# Altium PCB Arduino_PCB.PcbDoc
Units mm, origin at the board's own origin, x right, y up, seen from the top; angles counter-clockwise.
Board outline 385.83 x 207.26 mm, 2 copper layers (Top Layer, Bottom Side); 113 components, 62 nets, 247 pads, 0 vias.
Unrouted connection lines stored in the file: 30.
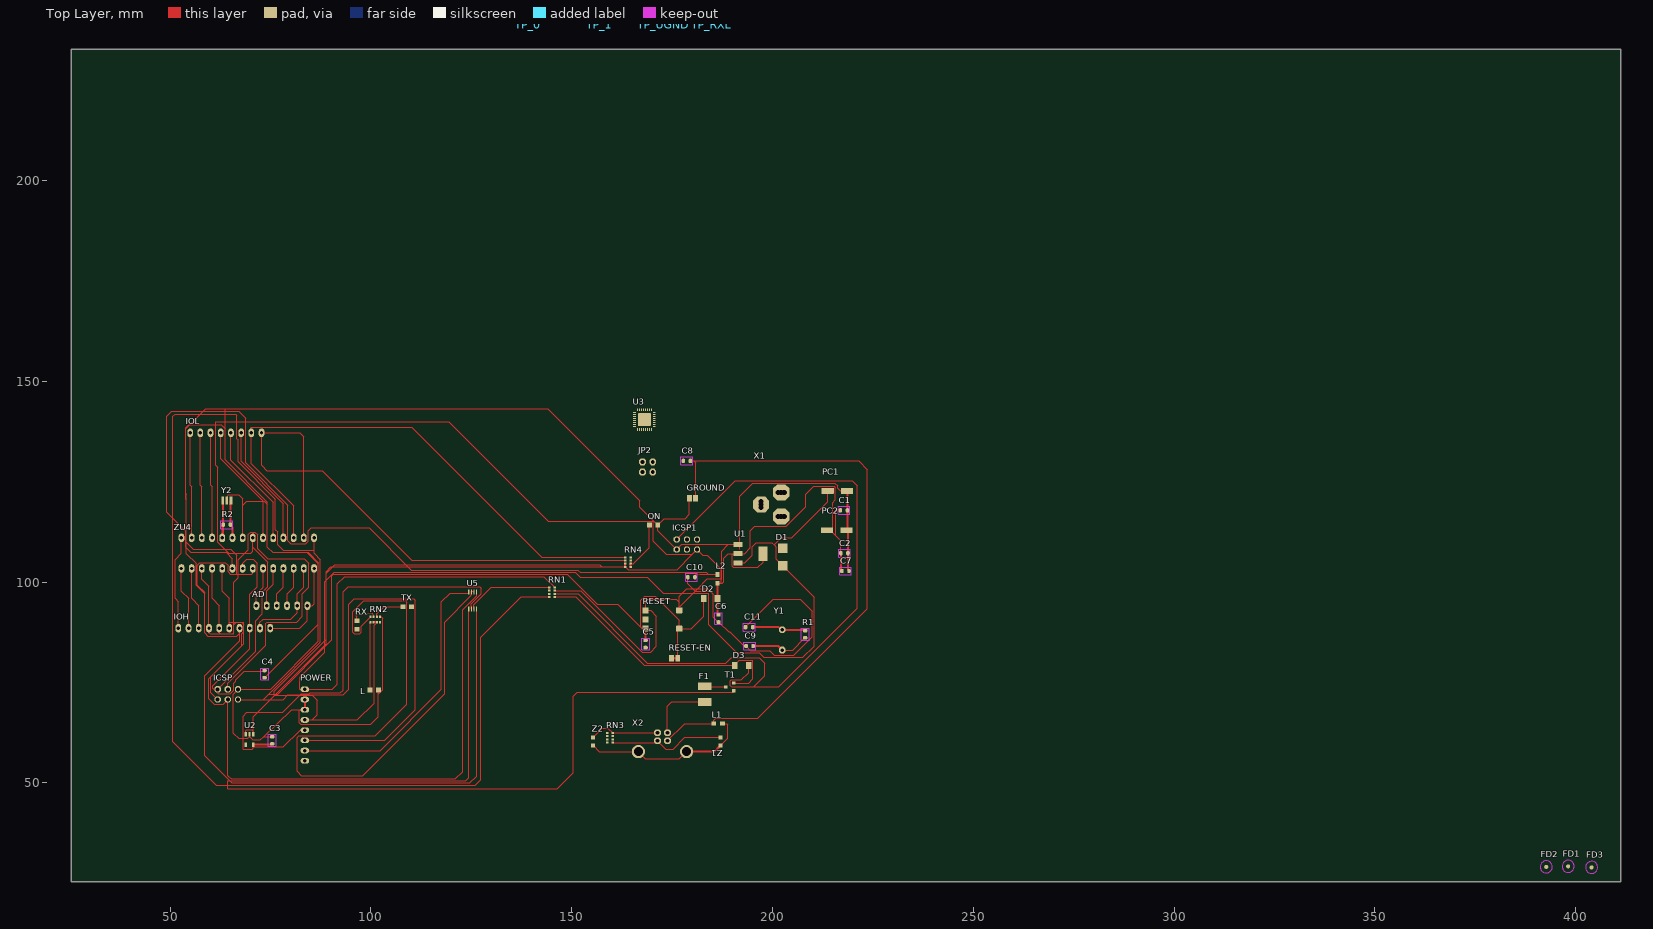
[diagram p0: Top Layer view]
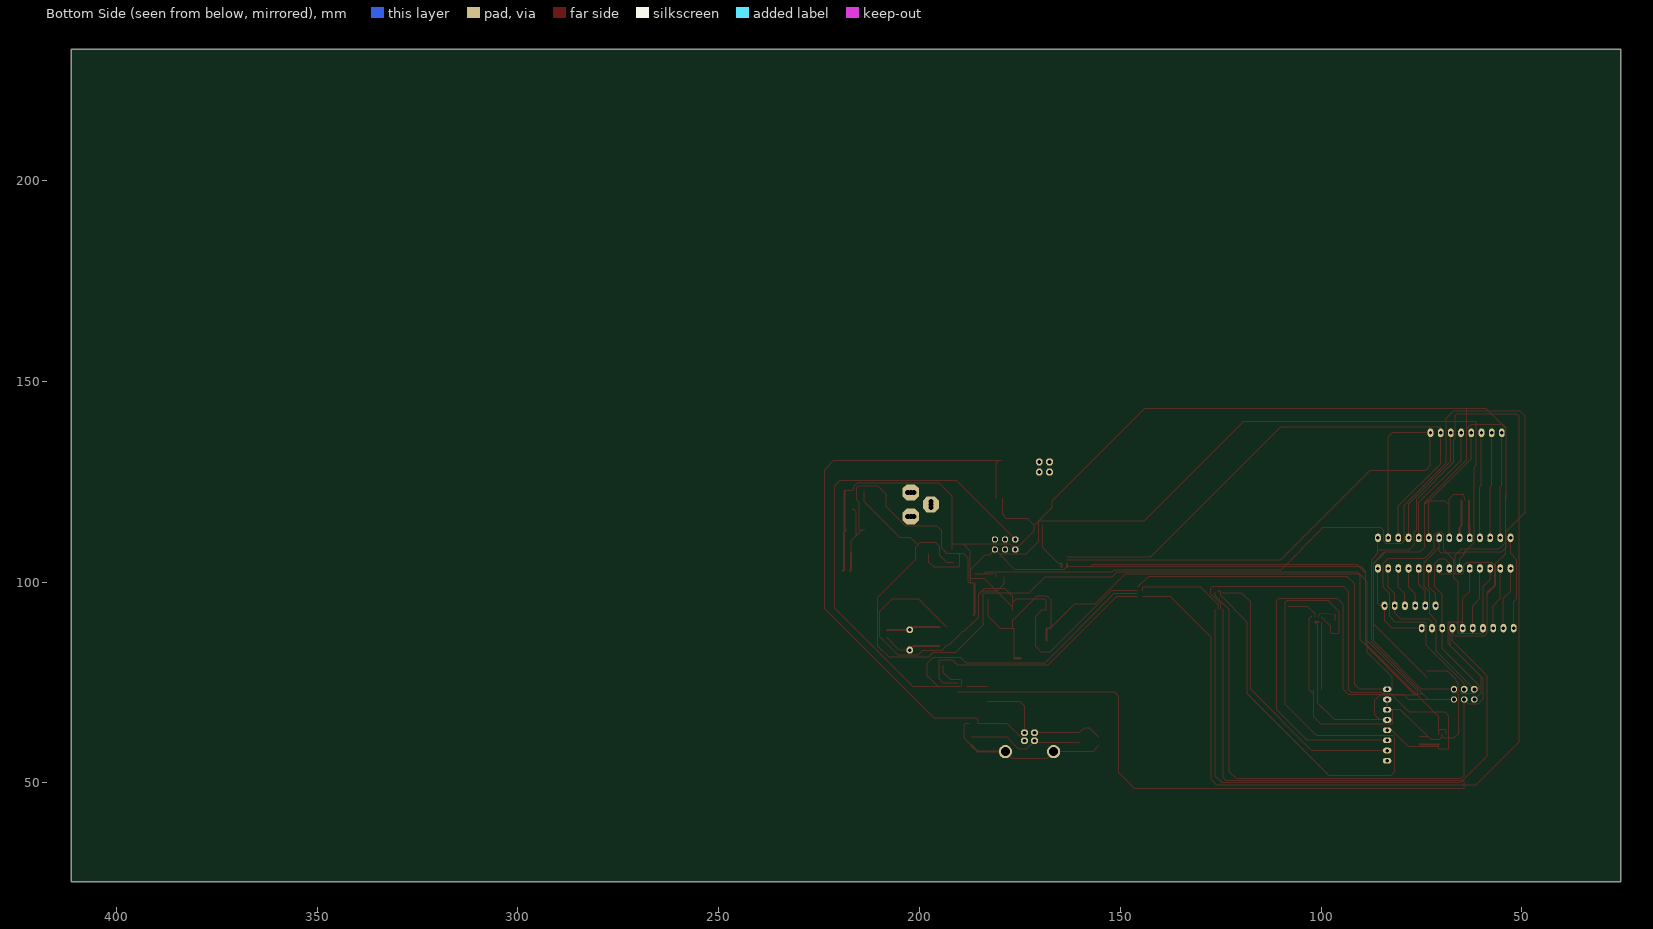
[diagram p1: Bottom Side view, seen from below]

## Layer stack, top to bottom
Top Solder: solder mask 0.0102, Solder Resist, Dk 3.5
Top Layer: signal copper 0.0356
Dielectric 1: dielectric 0.32, FR-4, Dk 4.8
Bottom Side: signal copper (thickness not stored)
Bottom Solder: solder mask 0.0102, Solder Resist, Dk 3.5

## Board outline
25.4,25.4 411.226,25.4 411.226,232.664 25.4,232.664

## Design rules (kind name [scope] priority, off if disabled: settings)
Clearance [All] p1: gap=0.254 ignorepadtopadclearanceinfootprint=FALSE
DiffPairsRouting [All] p1: maxlimit=0.254 minlimit=0.254 mostfreqgap=0.254 toplayer_minwidth=0.381 toplayer_maxwidth=0.381 toplayer_prefwidth=0.381 bottomlayer_minwidth=0.381 bottomlayer_maxwidth=0.381 bottomlayer_prefwidth=0.381 substack1={21367B57-AEF0-4E4E-8D23-0A43C6DC3519} toplayer_{21367b57-aef0-4e4e-8d23-0a43c6dc3519}_minwidth=0.381 toplayer_{21367b57-aef0-4e4e-8d23-0a43c6dc3519}_maxwidth=0.381 toplayer_{21367b57-aef0-4e4e-8d23-0a43c6dc3519}_prefwidth=0.381 bottomlayer_{21367b57-aef0-4e4e-8d23-0a43c6dc3519}_minwidth=0.381 bottomlayer_{21367b57-aef0-4e4e-8d23-0a43c6dc3519}_maxwidth=0.381 bottomlayer_{21367b57-aef0-4e4e-8d23-0a43c6dc3519}_prefwidth=0.381 maxuncoupledlength=12.7
PolygonConnect [All] p1: connectstyle=Relief reliefconductorwidth=0.254 reliefentries=4 polygonreliefangle="90 Angle" airgapwidth=0.254
RoutingLayers [All] p1: top layer_v5=TRUE bottom layer_v5=FALSE
RoutingVias [All] p1: holewidth=0.711 width=1.27 viastyle="Through Hole" minholewidth=0.711 minwidth=1.27 maxholewidth=0.711 maxwidth=1.27
SolderMaskExpansion [All] p1: expansion=0.102 istentingtop=FALSE
SupplyNets "Schematic Supply Nets_1" [InNet('+5V')] p1: voltage=0.000
SupplyNets "Schematic Supply Nets" [InNet('GND')] p2: voltage=0.000
Width [All] p1: maxlimit=0.254 minlimit=0.254 preferedwidth=0.254 substack1={21367B57-AEF0-4E4E-8D23-0A43C6DC3519} toplayer_{21367b57-aef0-4e4e-8d23-0a43c6dc3519}_minwidth=0.508 toplayer_{21367b57-aef0-4e4e-8d23-0a43c6dc3519}_maxwidth=0.508 toplayer_{21367b57-aef0-4e4e-8d23-0a43c6dc3519}_prefwidth=0.508
28 further rules are at their usual default settings.

## Components (designator, comment, footprint, x,y, rotation, side; value= is the part's Value field where it differs from the comment)
AD "6x1F-H8.5" 1X06 77.851,94.107 r0 top
C1 "100n" C0603-ROUND 217.805,117.856 r180 top
C2 "100n" C0603-ROUND 217.932,107.188 r180 top
C3 "1u" C0603-ROUND 75.438,60.579 r270 top
C4 "100n" C0603-ROUND 73.533,77.089 r90 top
C5 "100n" C0603-ROUND 168.402,84.582 r90 top
C6 "100n" C0603-ROUND 186.563,90.932 r90 top
C7 "100n" C0603-ROUND 218.186,102.743 r0 top
C8 "1u" C0603-ROUND 178.689,130.175 r0 top
C9 "22p" C0603-ROUND 194.31,84.074 r180 top
C10 "100n" C0603-ROUND 179.832,101.219 r0 top
C11 "22p" C0603-ROUND 194.183,88.773 r180 top
D1 "M7" SMB 202.565,106.213 r90 top
D2 "CD1206-S01575" MINIMELF 184.609,95.885 r180 top
D3 "CD1206-S01575" MINIMELF 192.356,79.248 r0 top
F1 "MF-MSMF050-2 500mA" L1812 183.134,72.091 r270 top
FD1 "FIDUCIALMOUNT" FIDUCIA-MOUNT 398.145,29.21 r0 top
FD2 "FIDUCIALMOUNT" FIDUCIA-MOUNT 392.684,29.083 r0 top
FD3 "FIDUCIALMOUNT" FIDUCIA-MOUNT 403.987,28.956 r0 top
GROUND "SJ" SJ 180.086,120.904 r0 top
ICSP "3x2 M" 2X03 64.389,72.009 r0 top
ICSP1 "3x2 M" 2X03 178.689,109.347 r180 top
IOH "10x1F-H8.5" 1X10 63.5,88.519 r0 top
IOL "8x1F-H8.5" 1X08 63.881,137.16 r180 top
JP2 "2x2 M - NM" 2X02 168.91,128.651 r180 top
L "YELLOW" CHIP-LED0805 100.838,73.152 r270 top
L1 "BLM21" 0805 186.479,64.77 r0 top
L2 "10uH" 0805 186.309,100.795 r90 top
ON "GREEN" CHIP-LED0805 170.4,114.173 r270 top
ORIGIN "TP_SP" TP-SP 70.485,243.332 r90 top
PC1 "47u" PANASONIC_D 216.167,122.682 r180 top
PC2 "47u" PANASONIC_D 216.027,112.903 r180 top
POWER "8x1F-H8.5" 1X08 83.566,64.389 r90 top
R1 "1M" R0603-ROUND 208.153,86.995 r90 top
R2 "1M" R0603-ROUND 64.135,114.3 r180 top
RESET "TS42031-160R-TR-7260" TS42 172.593,90.678 r0 top
RESET-EN "SJ" SJ 175.641,81.026 r180 top
RN1 "10K" CAY16 145.074,97.479 r270 top
RN2 "1K" CAY16 101.092,90.678 r0 top
RN3 "22R" CAY16 159.512,61.214 r270 top
RN4 "1K" CAY16 163.997,104.972 r270 top
RX "YELLOW" CHIP-LED0805 96.52,89.315 r180 top
T1 "FDN340P" SOT-23 189.357,73.914 r270 top
TP_0 "TP_SP" TP-SP 139.192,238.76 r90 top
TP_1 "TP_SP" TP-SP 156.972,238.76 r90 top
TP_2 "TP_SP" TP-SP 391.541,250.698 r90 top
TP_3 "TP_SP" TP-SP 403.225,250.698 r90 top
TP_3V3 "TP_SP" TP-SP 453.644,171.958 r90 top
TP_4 "TP_SP" TP-SP 414.909,250.698 r90 top
TP_5 "TP_SP" TP-SP 422.275,250.698 r90 top
TP_5V "TP_SP" TP-SP 487.934,171.704 r90 top
TP_5V1 "TP_SP" TP-SP 496.824,171.704 r90 top
TP_6 "TP_SP" TP-SP 429.641,250.698 r90 top
TP_7 "TP_SP" TP-SP 447.421,250.698 r90 top
TP_8 "TP_SP" TP-SP 436.88,224.282 r90 top
TP_9 "TP_SP" TP-SP 442.976,208.28 r90 top
TP_10 "TP_SP" TP-SP 460.756,208.28 r90 top
TP_11 "TP_SP" TP-SP 423.672,192.659 r90 top
TP_12 "TP_SP" TP-SP 431.8,192.659 r90 top
TP_13 "TP_SP" TP-SP 478.79,192.659 r90 top
TP_A0 "TP_SP" TP-SP 472.44,223.901 r90 top
TP_A1 "TP_SP" TP-SP 257.048,249.428 r90 top
TP_A2 "TP_SP" TP-SP 270.256,249.428 r90 top
TP_A3 "TP_SP" TP-SP 279.146,249.428 r90 top
TP_A4 "TP_SP" TP-SP 308.356,249.428 r90 top
TP_A5 "TP_SP" TP-SP 317.246,249.428 r90 top
TP_AREF "TP_SP" TP-SP 494.665,192.659 r90 top
TP_CMP "TP_SP" TP-SP 484.378,147.066 r90 top
TP_D+ "TP_SP" TP-SP 453.644,192.659 r90 top
TP_D- "TP_SP" TP-SP 444.754,192.659 r90 top
TP_DTR "TP_SP" TP-SP 246.634,249.428 r90 top
TP_GATE "TP_SP" TP-SP 437.261,147.066 r90 top
TP_LCMD "TP_SP" TP-SP 472.44,147.066 r90 top
TP_LL "TP_SP" TP-SP 463.804,171.958 r90 top
TP_MISO2 "TP_SP" TP-SP 396.621,272.669 r90 top
TP_MOSI2 "TP_SP" TP-SP 361.061,272.669 r90 top
TP_ONL "TP_SP" TP-SP 429.26,171.958 r90 top
TP_PB4 "TP_SP" TP-SP 350.647,272.669 r90 top
TP_PB5 "TP_SP" TP-SP 424.688,272.669 r90 top
TP_PB6 "TP_SP" TP-SP 332.105,272.669 r90 top
TP_PB7 "TP_SP" TP-SP 386.207,272.669 r90 top
TP_PWRIN "TP_SP" TP-SP 449.072,147.066 r90 top
TP_RESET "TP_SP" TP-SP 438.658,172.212 r90 top
TP_RESET2 "TP_SP" TP-SP 409.829,272.669 r90 top
TP_RX "TP_SP" TP-SP 52.705,243.332 r90 top
TP_RXL "TP_SP" TP-SP 184.912,238.76 r90 top
TP_SCK2 "TP_SP" TP-SP 374.269,272.669 r90 top
TP_SCL "TP_SP" TP-SP 320.294,272.923 r90 top
TP_SDA "TP_SP" TP-SP 309.88,272.923 r90 top
TP_TX "TP_SP" TP-SP 61.595,243.332 r90 top
TP_TXL "TP_SP" TP-SP 437.007,250.698 r90 top
TP_UGND "TP_SP" TP-SP 172.974,238.76 r90 top
TP_USBVCC "TP_SP" TP-SP 443.992,223.901 r90 top
TP_USH "TP_SP" TP-SP 424.561,223.901 r90 top
TP_VIN "TP_SP" TP-SP 462.28,147.066 r90 top
TP_VUCAP "TP_SP" TP-SP 458.978,223.901 r90 top
TP_XT1 "TP_SP" TP-SP 298.45,249.428 r90 top
TP_XT2 "TP_SP" TP-SP 450.342,208.28 r90 top
TP_XT3 "TP_SP" TP-SP 288.036,249.428 r90 top
TP_XT4 "TP_SP" TP-SP 481.33,223.901 r90 top
TP_XUSB "TP_SP" TP-SP 462.534,192.659 r90 top
TX "YELLOW" CHIP-LED0805 109.059,93.853 r270 top
U1 "NCP1117ST50T3G" SOT223 194.564,107.061 r270 top
U2 "LP2985-33DBVR" SOT23-DBV 69.784,60.803 r180 top
U3 "ATMEGA16U2-MU(R)" MLF32 168.111,140.442 r0 top
U5 "LMV358IDGKR" MSOP08 125.349,95.377 r0 top
X1 "POWERSUPPLY_DC21MMX" POWERSUPPLY_DC-21MM 202.26,122.682 r0 top
X2 "USB-B_TH" PN61729 172.613,57.774 r0 top
Y1 "16MHz" QS 202.438,85.598 r270 top
Y2 "CSTCE16M0V53-R0 16MHZ" RESONATOR 64.135,120.269 r0 top
Z1 "CG0603MLC-05E" CT/CN0603 187.071,60.309 r270 top
Z2 "CG0603MLC-05E" CT/CN0603 155.321,60.309 r270 top
ZU4 "ATMEGA328P-PU" DIL28-3 69.342,107.188 r180 top

## Footprints (in the part's own frame and the unit in brackets; to place one, negate y for a bottom-side part, rotate by r counter-clockwise, add the part's x,y. Pads: shape width x height; smd on the part's side, far side on the other; paste and mask are expansions set on the pad)
1X06 [mil] "1X06"
  oval 56x84 / inner round 0 / far side oval 56x84 hole 33.46: 1(-250,0) 2(-150,0) 3(-50,0) 4(50,0) 5(150,0) 6(250,0)
1X08 [mil] "1X08"
  oval 56x84 / inner round 0 / far side oval 56x84 hole 33.46: 1(-350,0) 2(-250,0) 3(-150,0) 4(-50,0) 5(50,0) 6(150,0) 7(250,0) 8(350,0)
1X10 [mil] "1X10"
  oval 56x84 / inner round 0 / far side oval 56x84 hole 33.46: 1(-450,0) 2(-350,0) 3(-250,0) 4(-150,0) 5(-50,0) 6(50,0) 7(150,0) 8(250,0) 9(350,0) 10(450,0)
2X02 [mil] "2X02"
  oct 66x66 / inner round 0 / far side oct 66x66 hole 37.4: 1(-50,-50) 2(-50,50) 3(50,-50) 4(50,50)
2X03 [mm] "2X03"
  oct 1.55x1.55 / inner round 0 / far side oct 1.55x1.55 hole 0.95: 1(-2.54,-1.27) 2(-2.54,1.27) 3(0,-1.27) 4(0,1.27) 5(2.54,-1.27) 6(2.54,1.27)
0805 [mm] "0805"
  rrect5% 1.2x1 smd: 1(-1.1,0) 2(1.1,0)
C0603-ROUND [mil] "C0603-ROUND"
  rrect80% 35.37x43.31 smd: 1(-35,0) 2(35,0)
  Top Layer keep-out lines w2: 57.99,38.7 -57.99,38.7 -57.99,-38.7 57.99,-38.7 57.99,38.7
CAY16 [mm] "CAY16"
  rrect10% 0.5x0.65 smd: 1(-1.2,-0.675) 2(-0.4,-0.675) 3(0.4,-0.675) 4(1.2,-0.675) 5(1.2,0.675) 6(0.4,0.675) 7(-0.4,0.675) 8(-1.2,0.675)
CHIP-LED0805 [mm] "CHIP-LED0805"
  rrect4% 1.2x1.2 smd: A(0,-1.05) C(0,1.05)
CT/CN0603 [mm] "CT/CN0603"
  rrect5% 1x1 smd: 1(-1,0) 2(1,0)
DIL28-3 [mil] "DIL28-3"
  oval 56x84 / inner round 0 / far side oval 56x84 hole 33.46: 1(-650,-150) 2(-550,-150) 3(-450,-150) 4(-350,-150) 5(-250,-150) 6(-150,-150) 7(-50,-150) 8(50,-150) 9(150,-150) 10(250,-150) 11(350,-150) 12(450,-150) 13(550,-150) 14(650,-150) 15(650,150) 16(550,150) 17(450,150) 18(350,150) 19(250,150) 20(150,150) 21(50,150) 22(-50,150) 23(-150,150) 24(-250,150) 25(-350,150) 26(-450,150) 27(-550,150) 28(-650,150)
FIDUCIA-MOUNT [mil] "FIDUCIA-MOUNT"
  rrect100% 40x40 smd: P$1(0,0)
  Top Layer keep-out circle w5: c0,0 r59.06
L1812 [mm] "L1812"
  rrect2% 1.9x3.4 smd: 1(-1.95,0) 2(1.95,0)
MINIMELF [mm] "MINIMELF"
  rrect3% 1.4x1.8 smd: A(1.7,0) C(-1.7,0)
MLF32 [mm] "MLF32"
  rrect80% 0.7x0.28 smd: 1(-2.45,1.75) 2(-2.45,1.25) 3(-2.45,0.75) 4(-2.45,0.25) 5(-2.45,-0.25) 6(-2.45,-0.75) 7(-2.45,-1.25) 8(-2.45,-1.75) 17(2.45,-1.75) 18(2.45,-1.25) 19(2.45,-0.75) 20(2.45,-0.25) 21(2.45,0.25) 22(2.45,0.75) 23(2.45,1.25) 24(2.45,1.75)
  rrect80% 0.28x0.7 smd: 9(-1.75,-2.45) 10(-1.25,-2.45) 11(-0.75,-2.45) 12(-0.25,-2.45) 13(0.25,-2.45) 14(0.75,-2.45) 15(1.25,-2.45) 16(1.75,-2.45) 25(1.75,2.45) 26(1.25,2.45) 27(0.75,2.45) 28(0.25,2.45) 29(-0.25,2.45) 30(-0.75,2.45) 31(-1.25,2.45) 32(-1.75,2.45)
  rrect15% 3.254x3.254 smd paste+0 mask+0: 33(0,0)
MSOP08 [mm] "MSOP08"
  rrect16% 0.3x1.2 smd: 1(-0.976,-2.113) 2(-0.326,-2.113) 3(0.324,-2.113) 4(0.974,-2.113) 5(0.974,2.112) 6(0.324,2.112) 7(-0.326,2.112) 8(-0.976,2.112)
PANASONIC_D [mm] "PANASONIC_D"
  rrect3% 3x1.4 smd: +(2.4,0) -(-2.4,0)
PN61729 [mil] "PN61729"
  oct 66x66 / inner round 0 / far side oct 66x66 hole 37.4: 1(49.21,185.43) 2(-49.21,185.43) 3(-49.21,106.69) 4(49.21,106.69)
  round 129.91 / inner round 0 / far side round 129.91 hole 86.61: P$1(-236.22,0) P$2(236.22,0)
POWERSUPPLY_DC-21MM [mil] "POWERSUPPLY_DC-21MM"
  oct 157.48x157.48 / inner round 0 / far side oct 157.48x157.48 hole 51.18: 1(-200,-132) 2(-3,-250) 3(-3,-14)
  round 76.77 / inner round 0 / far side round 76.77 hole 51.18: 4(-200,-162) 5(-200,-102) 6(-33,-14) 7(27,-14) 8(-33,-250) 9(27,-250)
QS [mil] "QS"
  oct 66x66 / inner round 0 / far side oct 66x66 hole 33.46: 1(-100,0) 2(100,0)
R0603-ROUND [mil] "R0603-ROUND"
  rrect80% 35.37x43.31 smd: 1(-35,0) 2(35,0)
  Top Layer keep-out lines w2: -57.99,38.7 57.99,38.7 57.99,-38.7 -57.99,-38.7 -57.99,38.7
RESONATOR [mm] "RESONATOR"
  rrect7% 0.7x2 smd: 1(-1,0) 2(0,0) 3(1,0)
SJ [mil] "SJ"
  rrect4% 46x63 smd: 1(-30,0) 2(30,0)
SMB [mm] "SMB"
  rrect2% 2.4x2.4 smd: A(2.2,0) C(-2.2,0)
SOT23-DBV [mm] "SOT23-DBV"
  rrect9% 0.55x1.2 smd: 1(-0.95,-1.3) 2(0,-1.3) 3(0.95,-1.3) 4(0.95,1.3) 5(-0.95,1.3)
SOT223 [mil] "SOT223"
  rrect4% 48x88 smd: 1(-91,-122) 2(0,-122) 3(91,-122)
  rrect2% 141.73x86.61 smd: 4(0,122.01)
SOT-23 [mil] "SOT-23"
  rrect6% 31x35 smd: 1(1,-40) 2(-37,40) 3(39,40)
TP-SP [mm] "TP-SP"
TS42 [mm] "TS42"
  rrect15% 1.6x1.4 smd: 1(-4.2,2.25) 2(4.2,2.25) 3(-4.2,-2.25) 4(4.2,-2.25)
  rrect15% 1.6x1.4 smd paste+0: 5(-4.2,0)

## Part data
AD: library part PINHD-1X6, "PIN HEADER", DeviceSetName=PINHD-1X6, GateName_1=A, LibraryName=SmartPrj, SymbolName_1=PINHD6
C1 C2 C3 C4 C5 C6 C7 C8 C9 C10 C11: library part C-EU0603-RND, "CAPACITOR, European symbol", DeviceName=0603-RND, DeviceSetName=C-EU, GateName_1=G$1, LibraryName=SmartPrj, SymbolName_1=C-EU
D1: library part DIODE-SMB, "DIODE", DeviceName=SMB, DeviceSetName=DIODE-, GateName_1=G$1, LibraryName=diode, SymbolName_1=D
D2 D3: library part DIODE-MINIMELF, "DIODE", DeviceName=MINIMELF, DeviceSetName=DIODE-, GateName_1=G$1, LibraryName=diode, SymbolName_1=D
F1: library part L-EUL1812, "INDUCTOR, European symbol", DeviceName=L1812, DeviceSetName=L-EU, GateName_1=G$1, LibraryName=rcl, SymbolName_1=L-EU
GROUND RESET-EN: "SMD solder JUMPER", DeviceSetName=SJ, GateName_1=1, LibraryName=jumper, SymbolName_1=SJ
ICSP ICSP1: library part PINHD-2X3, "PIN HEADER", DeviceSetName=PINHD-2X3, GateName_1=A, LibraryName=SmartPrj, SymbolName_1=PINH2X3
IOH: library part PINHD-1X10_ARD, "PIN HEADER", DeviceSetName=PINHD-1X10_ARD, GateName_1=A, LibraryName=SmartPrj, SymbolName_1=PINHD10
IOL POWER: library part PINHD-1X8, "PIN HEADER", DeviceSetName=PINHD-1X8, GateName_1=A, LibraryName=SmartPrj, SymbolName_1=PINHD8
JP2: library part PINHD-2X2, "PIN HEADER", DeviceSetName=PINHD-2X2, GateName_1=A, LibraryName=SmartPrj, SymbolName_1=PINH2X2
L ON RX TX: library part LEDCHIP-LED0805, "LED   OSRAM: - CHIPLED LG R971, LG N971, LY N971, LG Q971, LY Q971, LO R971, LY R971 LH N974, LH R974 LS Q976, LO Q976, LY Q976 LO Q996 - Hyper CHIPLED LW Q18S LB Q993, LB Q99A, LB R99A - SideLED LS A670, LO A670, LY A670, LG A670, LP A670 LB A673, LV A673, LT A673, LW A673 LH A674 LY A675 LS A676, LA A676, LO A676, LY A676, LW A676 LS A679, LY A679, LG A679 -  Hyper Micro SIDELEDÂ® LS Y876, LA Y876, LO Y876, LY Y876 LT Y87S - SmartLED LW L88C, LW L88S LB L89C, LB L89S, LG L890 LS L89K, LO L89K, LY L89K LS L896, LA L896, LO L896, LY L896 - TOPLED LS T670, LO T670, LY T670, LG T670, LP T670 LSG T670, LSP T670, LSY T670, LOP T670, LYG T670 LG T671, LOG T671, LSG T671 LB T673, LV T673, LT T673, LW T673 LH T674 LS T676, LA T676, LO T676, LY T676, LB T676, LH T676, LSB T676, LW T676 LB T67C, LV T67C, LT T67C, LS T67K, LO T67K, LY T67K, LW E67C LS E67B, LA E67B, LO E67B, LY E67B, LB E67C, LV E67C, LT E67C LW T67C LS T679, LY T679, LG T679 LS T770, LO T770, LY T770, LG T770, LP T770 LB T773, LV T773, LT T773, LW T773 LH T774 LS E675, LA E675, LY E675, LS T675 LS T776, LA T776, LO T776, LY T776, LB T776 LHGB T686 LT T68C, LB T68C - Hyper Mini TOPLEDÂ® LB M676 - Mini TOPLED SantanaÂ® LG M470 LS M47K, LO M47K, LY M47K    Source: http://www.osram.convergy.de   LUXEON: - LUMILEDÂ® LXK2-PW12-R00, LXK2-PW12-S00, LXK2-PW14-U00, LXK2-PW14-V00 LXK2-PM12-R00, LXK2-PM12-S00, LXK2-PM14-U00 LXK2-PE12-Q00, LXK2-PE12-R00, LXK2-PE12-S00, LXK2-PE14-T00, LXK2-PE14-U00 LXK2-PB12-K00, LXK2-PB12-L00, LXK2-PB12-M00, LXK2-PB14-N00, LXK2-PB14-P00, LXK2-PB14-Q00 LXK2-PR12-L00, LXK2-PR12-M00, LXK2-PR14-Q00, LXK2-PR14-R00 LXK2-PD12-Q00, LXK2-PD12-R00, LXK2-PD12-S00 LXK2-PH12-R00, LXK2-PH12-S00 LXK2-PL12-P00, LXK2-PL12-Q00, LXK2-PL12-R00    Source: www.luxeon.com   KINGBRIGHT:   KA-3528ASYC Source: www.kingbright.com", DeviceName=CHIP-LED0805, DeviceSetName=LED, GateName_1=G$1, LibraryName=led, SymbolName_1=LED
L1: library part WE-CBF_0805, "SMD EMI Suppression Ferrite Beads - excellent anti-EMI properties - low DCR - impedances till 3000 ohms - rated current up to 6 A", DeviceName=_0805, DeviceSetName=WE-CBF, GateName_1=G$1, LibraryName=wuerth-elektronik, SymbolName_1=L
L2: library part 0715_CV201210-100K, "10uH 0805", CASE=0805, DeviceSetName=0715_CV201210-100K, GateName_1=G$1, LibraryName=Induttanze, MONTHLY_USAGE=_____, PART_NUMBER=CV201210-100K, PRICE=_____, SUPPLIER=_____, SymbolName_1=L, TYPE=Induttanze
PC1 PC2: library part CPOL-EUD, "POLARIZED CAPACITOR, European symbol", +=+, DeviceName=D, DeviceSetName=CPOL-EU, GateName_1=G$1, LibraryName=rcl, SymbolName_1=CPOL
R1 R2: library part R-EU_R0603, "RESISTOR, European symbol", DeviceName=R0603, DeviceSetName=R-EU_, GateName_1=G$1, LibraryName=SmartPrj, SymbolName_1=R-EU
RESET: library part TS42, "TS42 Dongnan Electronics Tact switch VDC 12V - 50mA", DeviceSetName=TS42, GateName_1=G$1, LibraryName=SmartPrj, SymbolName_1=ST-MOD_V1.4_TS42
RN1 RN2 RN3 RN4: library part 4R-NCAY16, "Array Chip Resistor   Source: RS Component / Phycomp", DeviceName=CAY16, DeviceSetName=4R-N, GateName_1=A, GateName_2=B, GateName_3=C, GateName_4=D, LibraryName=resistor-dil, SymbolName_1=R1NV, SymbolName_2=R1NV, SymbolName_3=R1NV, SymbolName_4=R1NV
T1: library part PMOSSOT23, "MOS FET", DeviceSetName=PMOSSOT23, GateName_1=A, LibraryName=zetex, SymbolName_1=P_MOSFET
U1: library part MC33269ST*, "Adjustable Output Low Dropout Voltage Regulator 800 mA   Source: http://www.onsemi.com/pub/Collateral/MC33269-D.PDF", DeviceSetName=MC33269ST*, GateName_1=G$1, LibraryName=linear, SymbolName_1=VREG-O2
U2: library part LP2985-XXDBVR, "ULTRALOW-POWER 50-mA LOW-DROPOUT LINEAR REGULATORS   50-mA Low-Dropout Regulator Source: http://focus.ti.com/lit/ds/symlink/tps77001.pdf", DeviceSetName=LP2985-XXDBVR, GateName_1=G$1, LibraryName=SmartPrj, SymbolName_1=LP2985-XXDBVR
U3: library part ATMEGA16U2-MU, DeviceName=MU, DeviceSetName=ATMEGA16U2-, GateName_1=G$1, LibraryName=SmartPrj, SymbolName_1=ATMEL_MEGA8U2
U5: library part LMV358?*MM, "Dual General Purpose, Low Voltage, Rail-to-Rail Output Operational Amplifiers   Source: http://www.national.com/mpf/LM/LMV321.html http://www.national.com/dt/lmv_qual.pdf", DeviceName=MM, DeviceSetName=LMV358?*, GateName_1=A, GateName_2=B, GateName_3=P, LibraryName=linear, SymbolName_1=OPAMP, SymbolName_2=OPAMP, SymbolName_3=PWR+-, V+=V+, V-=V-
X2: library part PN61729, "BERG USB connector", DeviceSetName=PN61729, GateName_1=G$1, LibraryName=SmartPrj, SymbolName_1=J11, USB=USB
Y1: library part XTAL/S, "CRYSTAL", DeviceSetName=XTAL/S, GateName_1=G$1, LibraryName=SmartPrj, SymbolName_1=XTAL
Y2: library part RESONATORMU, DeviceName=MU, DeviceSetName=RESONATOR, GateName_1=G$1, LibraryName=SmartPrj, SymbolName_1=RESONATOR
Z1 Z2: library part VARISTORCN0603, "VARISTOR", DeviceName=CN0603, DeviceSetName=VARISTOR, GateName_1=G$1, LibraryName=varistor, SymbolName_1=VARISTOR
ZU4: "MICROCONTROLLER   4 Kbytes FLASH   128 bytes SRAM   256 bytes EEPROM   UART   6-channel 10 bit ADC", DeviceName=PU, DeviceSetName=ATMEGA328P-, GateName_1=G$1, LibraryName=SmartPrj, SymbolName_1=20-I/O-2
FD1 FD2 FD3: DeviceSetName=FIDUCIALMOUNT, GateName_1=G$1, LibraryName=SmartPrj, SymbolName_1=FIDUCIAL
ORIGIN TP_0 TP_1 TP_2 TP_3 TP_3V3 TP_4 TP_5 TP_5V TP_5V1 TP_6 TP_7 TP_8 TP_9 TP_10 TP_11 TP_12 TP_13 TP_A0 TP_A1 TP_A2 TP_A3 TP_A4 TP_A5 TP_AREF TP_CMP TP_D+ TP_D- TP_DTR TP_GATE TP_LCMD TP_LL TP_MISO2 TP_MOSI2 TP_ONL TP_PB4 TP_PB5 TP_PB6 TP_PB7 TP_PWRIN TP_RESET TP_RESET2 TP_RX TP_RXL TP_SCK2 TP_SCL TP_SDA TP_TX TP_TXL TP_UGND TP_USBVCC TP_USH TP_VIN TP_VUCAP TP_XT1 TP_XT2 TP_XT3 TP_XT4 TP_XUSB: DeviceSetName=TP_SP, GateName_1=G$1, LibraryName=SmartPrj, SymbolName_1=TP-SP
X1: DeviceName=X, DeviceSetName=POWERSUPPLY_DC21MM, GateName_1=G$1, LibraryName=SmartPrj, SymbolName_1=POWERSUPPLY_DC21PWR

## Nets (pads, with @x,y where several pads share a name; then routed paths per layer and width w, separated by ;. In a path a pad name is that pad's centre, name@x,y a point inside that pad or via, vN(x,y) a via of type N, cw(c..) or ccw(c..) an arc to the next point about the centre after c; other vN are vias at no path point)
+3V3: C3.2 POWER.4 U2.5 U5.2 | length 124.5
  Top Layer w0.254: U2.5 U2.5@70.734,58.953 ; POWER.4 82.398,63.119 78.232,58.953 U2.5@70.734,58.953 ; U5.2 125.023,94.552 127.508,97.037 127.508,98.46 127.136,98.831 94.361,98.831 93.066,97.536 93.066,73.101 92.38,72.415 84.887,72.415 84.658,72.187 82.702,72.187 78.054,67.539 69.088,67.539 68.174,66.624 68.174,58.42 68.179,58.415 70.475,58.415 70.734,58.674 U2.5@70.734,58.953
  Top Layer w0.508: U2.5 70.734,59.576 70.755,59.597 75.345,59.597 C3.2
+5V: C1.2 C2.2 C6.2 C7.1 D2.C D3.C ICSP1.2 ICSP.2 L2.1 PC2.+ POWER.2 POWER.5 RN1.3 RN1.5 RN2.2 RN2.3 RN4.3 RN4.4 T1.2 U1.2 U1.4 U2.1 U2.3 U3.4 U3.32 U5.8 ZU4.7 | length 762.8
  Top Layer w0.254: ICSP.2 71.298,82.728 71.298,90.399 72.949,92.05 72.949,97.485 74.346,98.882 74.346,104.978 70.612,108.712 ; U2.3 68.834,62.941 69.088,63.195 70.358,63.195 70.734,62.819 ; ZU4.7 70.612,108.712 ; U2.1 70.734,62.819 ; POWER.2 102.311,58.039 117.577,73.304 117.577,95.098 119.71,97.231 124.373,97.231 U5.8 ; POWER.5 85.344,65.659 ; RN2.3 101.492,89.916 100.838,89.262 100.838,69.85 96.647,65.659 85.344,65.659 ; RN1.5 151.07,96.279 168.101,79.248 D3.C 190.656,79.448 191.739,80.531 195.148,80.531 195.148,75.946 194.056,74.854 T1.2 ; L2.1 186.944,99.695 ; U1.4 197.663,104.978 196.368,103.683 190.246,103.683 189.967,103.962 189.967,106.782 190.246,107.061 ; PC2.+ PC2.+@214.427,112.903 ; C1.2 216.916,117.9 216.729,118.087 216.408,118.087 215.775,117.454 215.775,111.555 ; C2.2 217.043,110.287 215.775,111.555 ; 70.612,108.712 70.612,107.696 70.104,107.188 64.618,107.188 61.9,109.906 61.9,128.524 61.341,129.083 61.341,139.878 119.405,139.878 144.12,115.164 170.332,115.164 170.332,110.185 173.609,106.909 180.061,106.909 ; 70.734,62.819 70.734,66.518 76.073,71.857 ; 76.073,71.857 88.875,84.658 88.875,85.7 ; 76.073,71.857 85.344,71.857 86.589,70.612 86.589,66.904 85.344,65.659 ; 76.073,71.857 75.946,71.857 75.946,72.771 88.875,85.7 ; 88.875,85.7 88.875,102.133 ; 88.875,102.133 90.5,103.759 ; 88.875,102.133 88.875,102.616 90.018,103.759 90.5,103.759 ; 90.5,103.759 157.785,103.759 157.798,103.772 ; 90.5,103.759 91.034,104.292 156.985,104.292 157.505,103.772 157.798,103.772 ; 157.798,103.772 RN4.4 163.398,103.772 164.072,103.099 176.251,103.099 180.061,106.909 ; 180.061,106.909 ICSP1.2 182.601,106.705 183.718,106.705 187.198,103.226 187.198,99.949 186.944,99.695 ; 186.944,99.695 187.452,99.695 187.833,100.076 187.833,105.918 188.976,107.061 190.246,107.061 ; 190.246,107.061 U1.2 193.04,107.061 194.462,108.483 194.462,112.776 195.637,113.951 203.486,113.951 208.331,118.796 208.331,121.92 210.312,123.901 215.392,123.901 215.697,123.596 215.697,120.447 214.986,119.736 214.986,112.903 PC2.+@214.427,112.903 ; PC2.+@214.427,112.903 215.775,111.555
  Top Layer w0.508: RN2.2 RN2.3 ; RN4.4 RN4.3 ; L2.1 D2.C 186.309,92.075 186.332,92.052 186.332,92.008 186.519,91.821 C6.2 ; C2.2 217.043,103.155 217.297,102.901 C7.1
AD0: AD.1 ZU4.23 | length 10
  Top Layer w0.254: AD.1 71.501,97.104 73.152,98.755 ZU4.23
AD1: AD.2 ZU4.24 | length 10
  Top Layer w0.254: AD.2 74.041,97.841 75.692,99.492 ZU4.24
AD2: AD.3 ZU4.25 | length 10
  Top Layer w0.254: AD.3 76.581,97.079 78.232,98.73 ZU4.25
AD3: AD.4 ZU4.26 | length 10
  Top Layer w0.254: AD.4 79.121,97.079 80.772,98.73 ZU4.26
AD4/SDA: AD.5 IOH.9 ZU4.27 | length 23.5
  Top Layer w0.254: IOH.9 72.39,89.992 73.152,90.754 80.112,90.754 81.661,92.304 AD.5 81.661,97.079 83.312,98.73 ZU4.27
AD5/SCL: AD.6 IOH.10 ZU4.28 | length 24.4
  Top Layer w0.254: IOH.10 82.296,88.519 84.201,90.424 AD.6 85.344,94.107 85.852,94.615 ZU4.28
AREF: C4.2 IOH.8 ZU4.21 | length 58.5
  Top Layer w0.254: ZU4.21 68.072,104.648 69.088,105.664 70.688,105.664 71.704,104.648 71.704,98.869 69.85,97.014 IOH.8 69.85,83.366 60.652,74.168 60.652,73.524 61.976,72.2 64.961,72.2 65.8,73.039 65.8,74.803 66.308,75.311 66.308,75.706 68.45,77.848 73.403,77.848 C4.2
AVCC: C10.2 L2.2 ZU4.20 | length 224.9
  Top Layer w0.254: ZU4.20 65.532,105.842 64.008,107.366 55.169,107.366 53.924,108.61 53.924,112.598 49.2,117.323 49.2,141.224 50.47,142.494 67.132,142.494 68.783,140.843 68.783,129.72 79.324,119.179 79.324,110.236 80.01,109.55 83.82,109.55 84.404,110.134 84.404,112.776 85.141,113.513 99.543,113.513 110.109,102.946 151.536,102.946 152.095,102.387 183.566,102.387 184.058,101.895 ; C10.2 180.829,101.327 180.975,102.108 181.856,101.895 184.058,101.895 ; L2.2 184.058,101.895
CMP: RN1.1 RN1.2 U5.3 | length 22.4
  Top Layer w0.254: U5.3 125.673,94.395 129.957,98.679 RN1.1 RN1.2
D+: RN3.5 X2.3 Z1.1 | length 29.1
  Top Layer w0.254: RN3.5 170.893,60.014 X2.3 173.427,58.42 175.26,58.42 178.149,61.309 Z1.1
D-: RN3.8 X2.2 Z2.1 | length 17.5
  Top Layer w0.254: Z2.1 157.639,63.627 158.974,63.627 RN3.8 160.257,62.484 X2.2
DTR: C5.1 RN2.4 U3.13
GATE_CMD: T1.3 U5.1 | length 251.6
  Top Layer w0.254: U5.1 124.373,51.322 123.571,50.521 64.414,50.521 64.414,48.539 146.355,48.539 150.368,52.553 150.368,71.501 151.384,72.517 190.373,72.517 T1.3
GND: C1.1 C2.1 C3.1 C4.1 C6.1 C7.2 C9.2 C10.1 C11.2 GROUND.1 ICSP1.6 ICSP.6 IOH.7 L.C ON.C PC1.- PC2.- POWER.6 POWER.7 RESET.1 RESET.2 RN1.7 RN2.5 U1.1 U2.2 U3.3 U3.33 U5.4 X1.1 X1.3 Y2.2 ZU4.8 ZU4.22 | length 898
  Top Layer w0.254: Y2.2 64.44,121.717 67.056,121.717 68.072,120.701 68.072,119.101 ; IOH.7 67.31,87.249 ; ZU4.8 68.072,119.101 ; U2.2 69.784,61.468 ; ZU4.22 70.612,102.133 70.358,101.879 ; C4.1 73.634,76.2 86.944,89.51 ; C3.1 73.279,61.468 ; POWER.6 82.118,68.199 ; L.C 101.888,72.178 ; RN2.5 102.292,91.364 102.616,91.364 102.946,91.034 102.946,73.152 101.93,72.136 101.888,72.178 ; U5.4 126.323,51.698 124.638,50.013 65.329,50.013 58.598,56.744 58.598,76.632 67.31,85.344 67.31,87.249 ; RN1.7 152.253,97.879 167.607,82.525 169.672,82.525 171.12,83.972 171.12,91.48 169.672,92.928 RESET.1 168.393,95.461 168.656,95.724 176.031,95.724 176.793,94.962 ; RESET.2 176.793,93.786 ; C10.1@178.943,101.349 C10.1 178.943,99.568 180.137,98.374 ; GROUND.1 179.324,116.84 178.257,115.773 173.05,115.773 ON.C ; C6.1 186.462,90.043 185.224,91.281 185.224,96.97 184.869,97.325 ; C6.1@186.664,90.043 189.097,87.61 189.374,87.61 192.679,84.305 193.234,84.305 193.421,84.118 C9.2 194.467,82.928 199.326,82.928 200.467,81.787 205.341,81.787 209.883,86.329 209.883,92.767 206.892,95.758 200.178,95.758 193.294,88.874 C11.2 ; 191.841,108.179 U1.1@191.841,109.372 ; PC1.- 216.916,122.682 216.205,123.393 216.205,123.952 215.505,124.652 195.072,124.652 191.841,121.421 U1.1@191.841,109.372 ; 53.899,122.072 53.899,138.176 ; 53.899,122.072 53.899,120.675 54.077,120.498 ; 53.899,122.072 54.077,121.895 54.077,120.498 ; 53.899,138.176 54.839,139.116 ; 53.899,138.176 53.899,138.379 54.635,139.116 54.839,139.116 ; 54.077,109.957 54.077,107.036 56.464,104.648 56.464,99.263 58.598,97.13 ; 54.077,109.957 54.077,120.498 ; 54.077,109.957 55.829,108.204 65.1,108.204 66.624,106.68 66.624,101.93 ; 54.839,139.116 62.763,139.116 63.703,138.176 ; 54.839,139.116 58.877,143.154 63.703,143.154 ; 58.598,97.13 58.598,97.485 56.82,99.263 56.82,104.242 57.404,104.826 63.754,104.826 64.44,104.14 64.44,102.514 65.024,101.93 66.624,101.93 ; 58.598,97.13 58.598,87.325 59.436,86.487 66.548,86.487 67.31,87.249 ; 63.703,138.176 63.703,143.154 ; 63.703,138.176 63.703,130.454 74.244,119.913 74.244,119.355 ; 63.703,143.154 144.018,143.154 166.98,120.193 166.98,118.643 ON.C ; 66.624,101.93 70.358,101.93 70.358,101.879 ; 66.624,101.93 66.624,101.879 70.358,101.879 ; 68.072,119.101 69.088,120.117 73.482,120.117 74.244,119.355 ; 69.784,61.468 69.403,61.087 67.056,61.087 65.761,62.382 65.761,72.111 ICSP.6 75.017,73.279 86.944,85.206 86.944,89.51 ; 69.784,61.468 70.546,60.706 72.517,60.706 73.279,61.468 ; 73.279,61.468 80.315,68.199 82.118,68.199 ; 74.244,119.355 74.244,108.712 75.59,107.366 84.074,107.366 ; 82.118,68.199 82.118,64.999 82.55,64.567 100.029,64.567 101.888,66.426 101.888,72.178 ; 84.074,107.366 84.404,107.366 86.944,104.826 86.944,104.496 ; 84.074,107.366 86.944,104.496 ; 86.944,89.51 86.944,104.496 ; ON.C 171.45,112.776 ICSP1.6 177.444,109.372 189.001,109.372 ; 176.793,93.786 180.759,97.752 ; 176.793,93.786 176.793,94.962 ; 176.793,94.962 176.793,96.52 178.647,98.374 180.137,98.374 ; 180.137,98.374 181.381,98.374 ; 180.137,98.374 180.759,97.752 ; 180.759,97.752 180.808,97.703 184.491,97.703 184.869,97.325 ; 180.759,97.752 181.381,98.374 ; 181.381,98.374 183.896,98.374 184.869,97.401 184.869,97.325 ; 181.381,98.374 183.794,100.787 187.325,100.787 187.325,107.696 189.001,109.372 ; 189.001,109.372 U1.1 U1.1@191.841,109.372
  Top Layer w0.508: POWER.6 POWER.7 ; PC1.- 218.694,122.555 C1.1 218.694,113.17 PC2.- 218.821,112.509 C2.1 218.821,102.997 C7.2
IO0: IOL.1 RN4.2 ZU4.2 | length 144.6
  Top Layer w0.254: ZU4.2 83.312,127.686 ; RN4.2 110.215,105.372 87.902,127.686 83.312,127.686 ; 83.312,127.686 83.312,136.144 82.296,137.16 IOL.1 72.771,129.032 74.117,127.686 83.312,127.686
IO1: IOL.2 RN4.1 ZU4.3 | length 138.5
  Top Layer w0.254: ZU4.3 80.772,118.961 70.231,129.502 IOL.2 70.231,138.608 110.134,138.608 142.57,106.172 RN4.1
IO2: IOL.3 ZU4.4 | length 30.5
  Top Layer w0.254: IOL.3 67.691,130.094 78.232,119.553 ZU4.4
IO3: IOL.4 ZU4.5 | length 30.5
  Top Layer w0.254: IOL.4 65.151,130.369 75.692,119.828 ZU4.5
IO4: IOL.5 ZU4.6 | length 30.5
  Top Layer w0.254: IOL.5 62.611,130.683 73.152,120.142 ZU4.6
IO5: IOL.6 ZU4.11 | length 26.3
  Top Layer w0.254: IOL.6 60.071,124.079 60.452,123.698 ZU4.11
IO6: IOL.7 ZU4.12 | length 26.3
  Top Layer w0.254: IOL.7 57.531,124.079 57.912,123.698 ZU4.12
IO7: IOL.8 ZU4.13 | length 26.3
  Top Layer w0.254: IOL.8 54.991,124.079 55.372,123.698 ZU4.13
IO8: IOH.1 ZU4.14 | length 23.5
  Top Layer w0.254: IOH.1 52.07,95.098 51.232,95.936 51.232,105.588 52.832,107.188 ZU4.14
IO9: IOH.2 ZU4.15 | length 15.6
  Top Layer w0.254: ZU4.15 52.832,97.739 54.61,95.961 IOH.2
L13: RN2.8 U5.6 U5.7 | length 166.3
  Top Layer w0.254: RN2.8 99.892,91.288 97.638,89.033 97.638,87.503 97.282,87.147 95.906,87.147 95.529,87.524 95.529,92.578 98.252,95.301 108.712,95.301 108.991,95.021 108.991,69.571 101.092,61.671 82.093,61.671 81.61,61.189 81.61,52.832 82.626,51.816 97.968,51.816 118.389,72.238 118.389,90.043 125.023,96.677 U5.7 125.023,97.678 125.673,97.678 U5.6
M8RXD: RN4.7 U3.9
M8TXD: RN4.8 U3.8
MISO: ICSP.1 IOH.5 ZU4.18 | length 48.7
  Top Layer w0.254: ZU4.18 60.452,95.936 62.23,94.158 IOH.5 62.23,87.325 62.484,87.071 65.862,87.071 65.862,89.408 66.421,89.967 67.843,89.967 68.402,89.408 68.402,84.684 60.122,76.403 60.122,72.466 ICSP.1
MISO2: ICSP1.1 U3.17
MOSI: ICSP.4 IOH.4 ZU4.17 | length 113.8
  Top Layer w0.254: ZU4.17 57.912,100.686 59.69,98.908 IOH.4 59.69,87.325 59.944,87.071 65.557,87.071 65.862,87.376 65.862,99.974 66.98,101.092 66.98,105.537 69.52,108.077 69.52,111.862 70.104,112.446 71.12,112.446 71.78,111.785 71.78,108.306 74.295,105.791 83.439,105.791 84.582,104.648 84.582,98.73 82.931,97.079 82.931,91.44 81.483,89.992 74.143,89.992 73.838,89.687 73.838,84.252 64.389,74.803 ICSP.4
MOSI2: ICSP1.4 U3.16
NetL_A: L.A RN2.1 | length 16.9
  Top Layer w0.254: L.A 99.788,81.201 99.892,81.305 RN2.1
NetON_A: ON.A RN4.5 RN4.6 | length 12.8
  Top Layer w0.254: RN4.6 165.379,104.572 169.35,108.543 ON.A
  Top Layer w0.508: RN4.5 RN4.6
NetRN2_6: RN2.6 TX.A | length 8
  Top Layer w0.254: RN2.6 101.492,92.043 103.302,93.853 TX.A
NetRN2_7: RN2.7 RX.A | length 6.4
  Top Layer w0.254: RX.A 96.52,91.301 96.376,91.445 96.376,91.839 96.425,91.888 96.52,91.888 100.338,92.186 RN2.7
NetTP_USBVCC_X: U3.31
PB4: JP2.1 U3.18
PB5: JP2.3 U3.19
PB6: JP2.2 U3.20
PB7: JP2.4 U3.21
PWRIN: D1.A X1.2
RD+: RN3.4 U3.29
RD-: RN3.1 U3.30
RESET: C5.2 D2.A ICSP.5 POWER.3 RESET-EN.1 RESET-EN.2 RESET.3 RESET.4 RN1.4 ZU4.1 | length 621.4
  Top Layer w0.254: ICSP.5 73.196,70.739 ; POWER.3 103.505,60.579 111.1,68.174 111.1,95.428 110.693,95.834 95.86,95.834 94.513,94.488 94.513,73.254 93.142,71.882 79.324,71.882 78.181,70.739 73.196,70.739 ; ZU4.1 85.852,107.925 ; RN1.4 137.389,96.279 127.381,86.272 127.381,50.749 125.984,49.352 61.544,49.352 50.724,60.173 50.724,141.3 51.232,141.808 66.345,141.808 66.599,141.554 66.599,135.712 66.929,135.382 66.929,129.997 76.251,120.675 76.251,113.081 76.784,112.547 76.784,109.245 78.13,107.899 85.827,107.899 85.852,107.925 ; RESET.3@168.393,88.424 RESET.3 ; RESET-EN.1 176.403,88.428 RESET.4 ; D2.A 182.909,91.505 179.832,88.428 RESET.4 ; 73.196,70.739 74.542,72.085 ; 74.542,72.085 87.452,84.996 87.452,105.588 85.852,107.188 85.852,107.925 ; 74.542,72.085 76.759,72.085 90.297,85.623 90.297,101.524 90.678,101.905 148.946,101.905 156.337,94.513 161.442,94.513 167.208,88.748 ; 167.208,88.748 167.528,88.428 RESET.3 ; 167.208,88.748 167.208,95.453 168.173,96.418 170.824,96.418 176.793,90.449 RESET.4 ; 167.208,88.748 RESET.3
  Top Layer w0.508: RESET.3@168.393,88.424 168.398,85.475 C5.2 ; RESET-EN.2 RESET-EN.1
RESET2: D3.A ICSP1.5 RN1.6 U3.24 | length 197.9
  Top Layer w0.254: RN1.6 151.583,97.079 168.855,79.807 188.341,79.807 189.736,81.202 196.68,81.202 198.12,79.761 198.12,76.713 195.295,73.889 ; ICSP1.5 190.703,125.171 219.837,125.171 221.056,123.952 221.056,93.421 201.524,73.889 195.295,73.889 ; D3.A 194.056,77.47 192.278,75.692 189.789,75.692 189.535,75.438 189.535,74.168 189.814,73.889 195.295,73.889
RXLED: RX.C U3.10
SCK: ICSP.3 IOH.6 U5.5 ZU4.19 | length 172.4
  Top Layer w0.254: ZU4.19 62.992,97.739 64.77,95.961 64.77,89.713 ; IOH.6 64.77,89.713 ; U5.5 126.323,96.571 122.851,93.098 122.851,52.812 121.067,51.029 65.176,51.029 64.389,51.816 ICSP.3 63.221,69.571 60.96,69.571 59.614,70.917 59.614,75.913 67.869,84.168 67.869,87.071 68.402,87.605 68.402,89.967 65.024,89.967 64.77,89.713
SCK2: ICSP1.3 U3.15
SS: IOH.3 ZU4.16 | length 15.6
  Top Layer w0.254: ZU4.16 55.372,95.936 57.15,94.158 IOH.3
TP_VUCAP: C8.1 U3.27
TXLED: TX.C U3.11
UGND: C8.2 GROUND.2 L1.1 U3.28 X2.4 | length 152.9
  Top Layer w0.254: X2.4 178.149,64.77 L1.1 185.379,65.532 185.887,66.04 196.28,66.04 223.647,93.407 223.647,128.016 221.488,130.175 180.34,130.175 ; C8.2 180.34,130.175 ; GROUND.2 180.848,129.667 180.34,130.175
USBVCC: F1.1 T1.1 | length 5.3
  Top Layer w0.254: F1.1 183.286,73.889 T1.1
USHIELD: L1.2 X2.P$1 X2.P$2 Z1.2 Z2.2 | length 41.8
  Top Layer w0.254: Z2.2 156.856,57.774 X2.P$1 168.38,56.007 176.846,56.007 X2.P$2 ; Z1.2 188.849,61.087 188.849,64.516 188.595,64.77 L1.2
  Top Layer w0.508: X2.P$2 185.536,57.774 Z1.2
VIN: D1.C PC1.+ POWER.8 RN1.8 U1.3 | length 320
  Top Layer w0.254: RN1.8 143.056,101.371 93.472,101.371 91.669,99.568 91.669,74.524 90.424,73.279 POWER.8 82.296,73.279 82.296,76.235 88.544,82.484 88.544,100.127 90.856,102.438 150.927,102.438 152.121,101.244 168.783,101.244 172.847,97.18 184.125,97.18 184.125,89.332 191.059,82.398 196.672,82.398 197.815,81.255 207.594,81.255 210.414,84.074 210.414,96.164 D1.C 200.939,105.639 200.939,108.712 200.415,109.236 ; U1.3 193.04,104.75 194.984,106.693 194.984,108.802 195.986,109.804 199.847,109.804 200.415,109.236 ; PC1.+ 213.767,120.016 204.756,111.005 202.184,111.005 200.415,109.236
XT1: C9.1 R1.1 U3.1 Y1.2 | length 14.6
  Top Layer w0.254: Y1.2 205.004,83.058 208.052,86.106 R1.1
  Top Layer w0.508: C9.1 201.422,84.074 Y1.2
XT2: C11.1 R1.2 U3.2 Y1.1 | length 13.4
  Top Layer w0.508: C11.1 201.533,88.773 202.168,88.138 Y1.1 202.565,88.011 208.026,88.011 R1.2
XTAL1: R2.1 Y2.3 ZU4.9 | length 9.5
  Top Layer w0.508: Y2.3 65.08,120.214 65.08,114.356 R2.1 65.024,114.142 65.532,113.634 ZU4.9
XTAL2: R2.2 Y2.1 ZU4.10 | length 9.4
  Top Layer w0.508: ZU4.10 63.119,111.125 63.119,114.173 R2.2 63.191,114.356 63.191,120.214 Y2.1
XUSB: F1.2 X2.1 | length 16.3
  Top Layer w0.254: X2.1 173.863,69.088 174.916,70.141 F1.2
pads on no net: FD1.P$1 FD2.P$1 FD3.P$1 POWER.1 RESET.5 RN3.2 RN3.3 RN3.6 RN3.7 U2.4 U3.5 U3.6 U3.7 U3.12 U3.14 U3.22 U3.23 U3.25 U3.26 X1.4 X1.5 X1.6 X1.7 X1.8 X1.9

## Text inside footprints (layer, text, board x,y; h text height)
U1: Mechanical 7 "3" at 190.246,106.04 h1.26 r270; Mechanical 7 "4" at 197.104,105.156 h1.26 r270; Mechanical 7 "1" at 190.246,110.514 h1.26 r270; Mechanical 7 "2" at 190.237,108.352 h1.26 r270
U3: Mechanical 7 "1" at 165.011,142.442 h1.26